# Altium PCB ESP32-with-USB_V0.1.PcbDoc (part 1 of 3)
Units mil, origin at the board's own origin, x right, y up, seen from the top; angles counter-clockwise.
Board outline 2720 x 1080 mil, 2 copper layers (TOP, BOTTOM); 64 components, 73 nets, 299 pads, 189 vias.
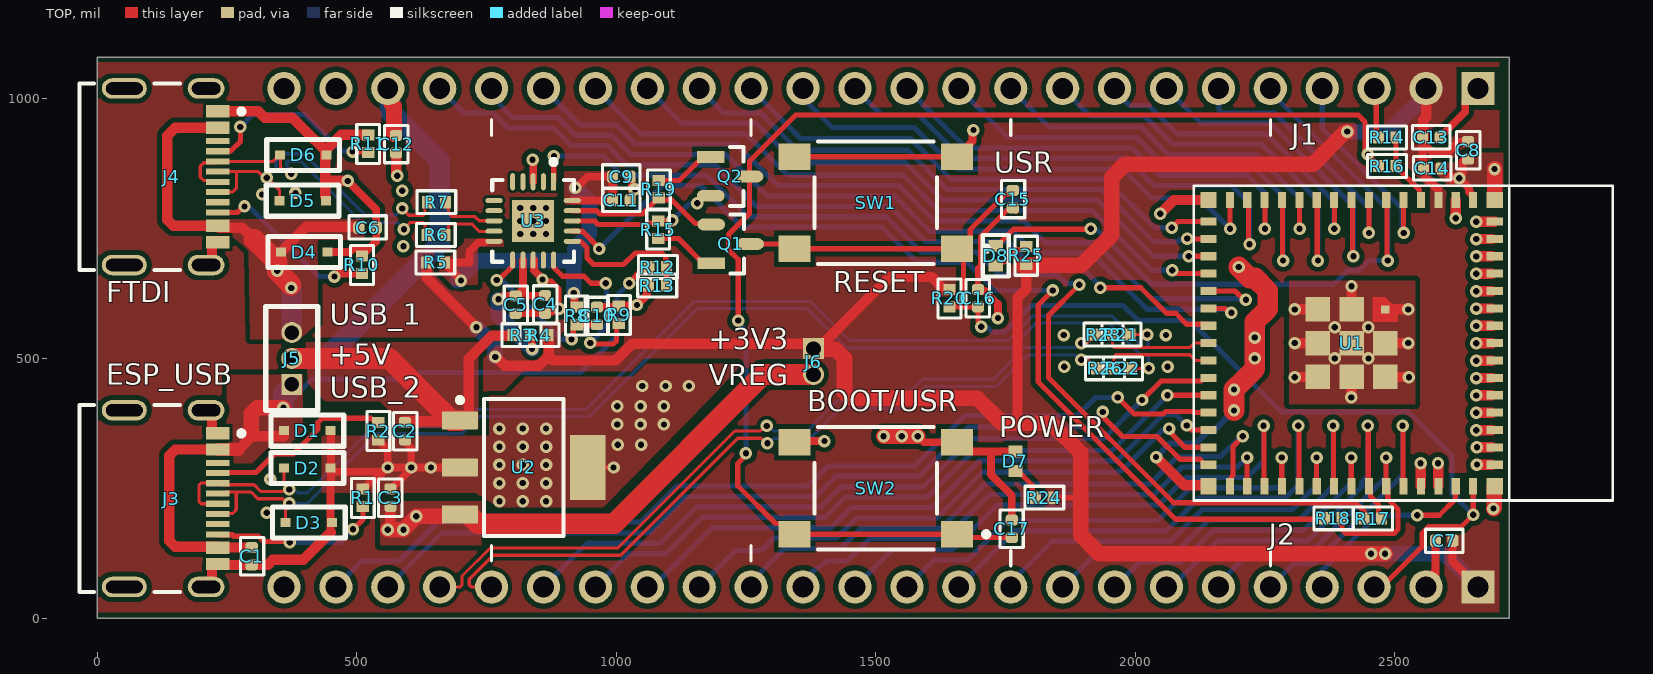
[diagram p0: TOP view]
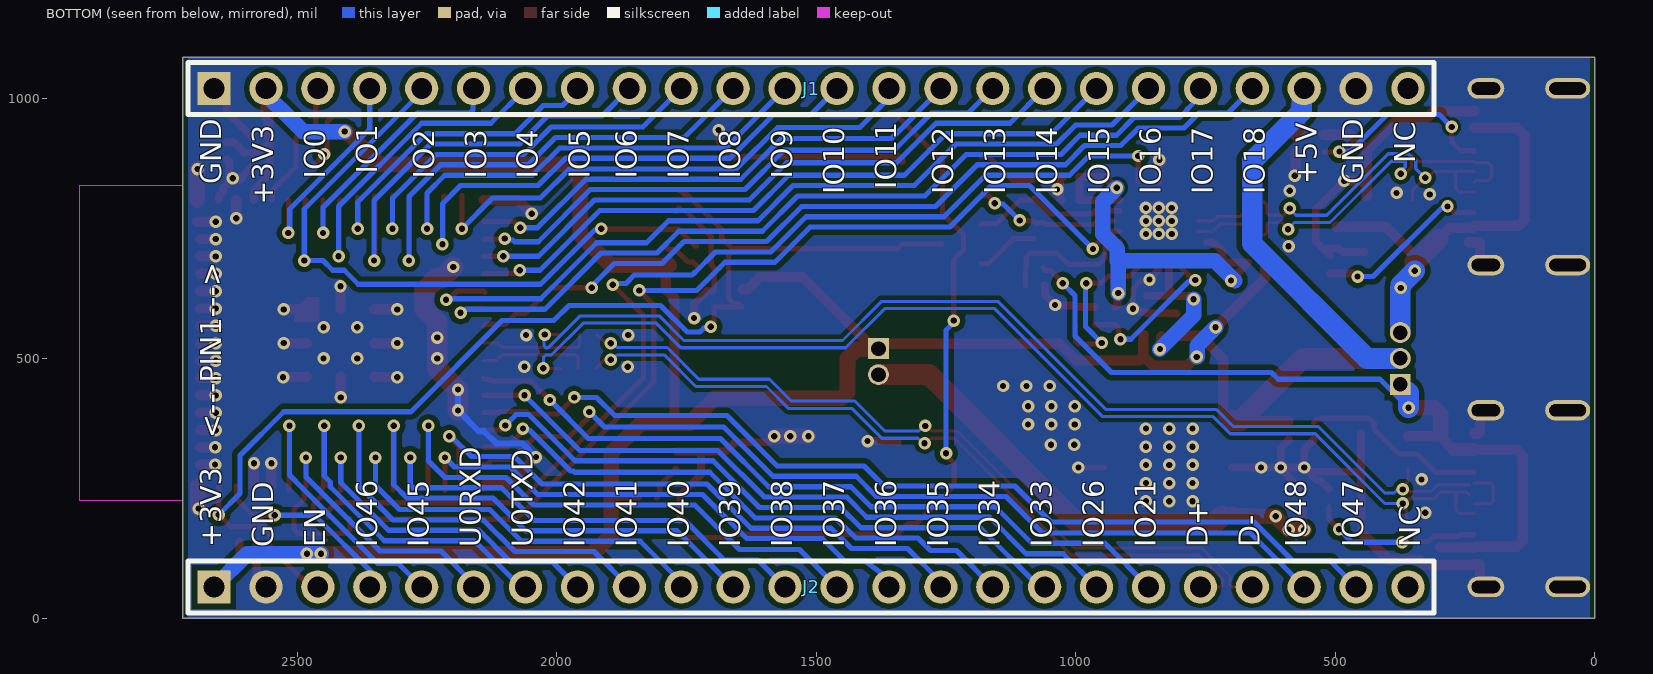
[diagram p1: BOTTOM view, seen from below]
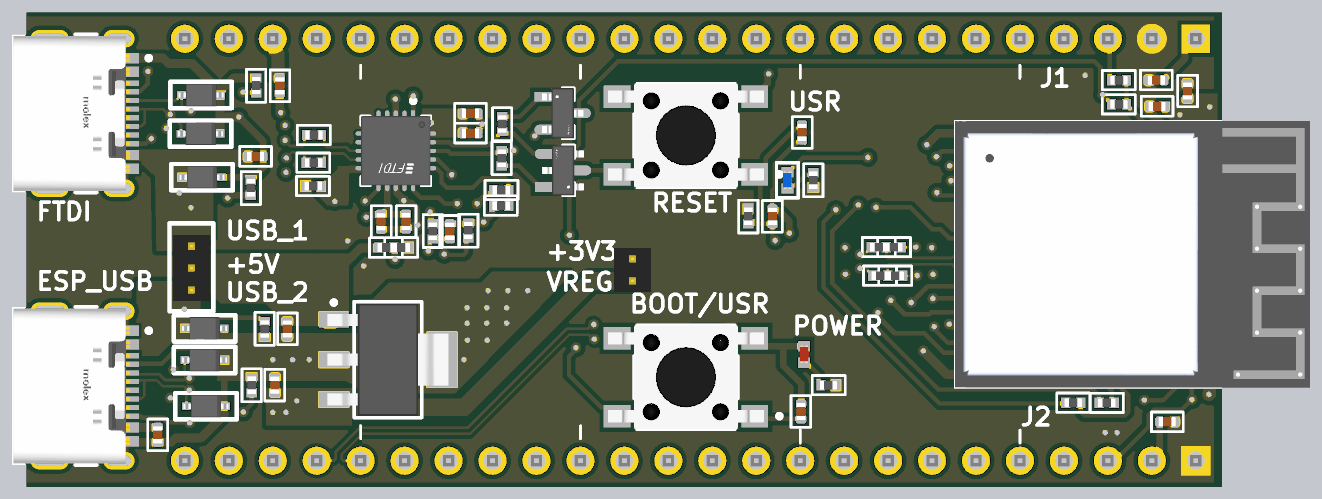
[diagram p3: 3D render of the assembled board from above, using the file's embedded part models]

## Layer stack, top to bottom
Top Solder: solder mask 0.4, Solder Resist, Dk 3.5
TOP: signal copper 1.378
Dielectric 1: dielectric 12.6, FR-4, Dk 4.8
BOTTOM: signal copper 1.378
Bottom Solder: solder mask 0.4, Solder Resist, Dk 3.5

## Board outline
0,0 2720,0 2720,1080 0,1080

## Design rules (kind name [scope] priority, off if disabled: settings)
Clearance DIFF90_Clearance [InDifferentialPairClass('DIFF90')] p1: gap=8 ignorepadtopadclearanceinfootprint=TRUE
Clearance SMALLER [WithinRoom('FTDI') or WithinRoom('USB') or WithinRoom('USB_1')] p2: gap=6 ignorepadtopadclearanceinfootprint=TRUE
Clearance [All] p3: gap=10 ignorepadtopadclearanceinfootprint=TRUE
ComponentClearance R22R26 [InComponent('R22') vs InComponent('R26')] p1: gap=0 collisioncheckmode=3 verticalgap=0 showdistances=FALSE
ComponentClearance R3R4 [InComponent('R3') vs InComponent('R4')] p2: gap=0 collisioncheckmode=3 verticalgap=0 showdistances=FALSE
ComponentClearance R21R23 [InComponent('R21') vs InComponent('R23')] p3: gap=0 collisioncheckmode=3 verticalgap=0 showdistances=FALSE
ComponentClearance [All] p4: gap=10 collisioncheckmode=3 verticalgap=10 showdistances=FALSE
DiffPairsRouting DIFF90 [InDifferentialPairClass('DIFF90')] p1: maxlimit=8.1 minlimit=8 mostfreqgap=8 toplayer_minwidth=6.03 toplayer_maxwidth=6.23 toplayer_prefwidth=6.03 bottomlayer_minwidth=6.03 bottomlayer_maxwidth=6.23 bottomlayer_prefwidth=6.03 maxuncoupledlength=500
DiffPairsRouting [All] p2: maxlimit=10 minlimit=10 mostfreqgap=10 toplayer_minwidth=15 toplayer_maxwidth=15 toplayer_prefwidth=15 bottomlayer_minwidth=15 bottomlayer_maxwidth=15 bottomlayer_prefwidth=15 maxuncoupledlength=500
NetAntennae [All] p1: netantennaetolerance=10
PlaneConnect [All] p1: pad.planeconnectstyle=Relief pad.reliefexpansion=20 pad.reliefentries=4 pad.reliefconductorwidth=20 pad.reliefairgap=10 via.planeconnectstyle=Direct via.reliefexpansion=20 via.reliefentries=4 via.reliefconductorwidth=10 via.reliefairgap=10
PolygonConnect [All] p1: connectstyle=Direct reliefconductorwidth=10 reliefentries=4 polygonreliefangle="90 Angle" airgapwidth=10
RoomDefinition USB_1 [False vs False] p1: confinementstyle=ConfineIn formatcopy=TRUE lockcomponents=FALSE outline 182.36,995.43 302.36,995.43 302.36,705.43 182.36,705.43
RoomDefinition USB [False vs False] p2: confinementstyle=ConfineIn formatcopy=TRUE lockcomponents=FALSE outline 183.74,375.13 303.74,375.13 303.74,85.13 183.74,85.13
RoomDefinition FTDI [False vs False] p3: confinementstyle=ConfineIn formatcopy=TRUE lockcomponents=FALSE outline 728,872 975,872 975,651 728,651
RoutingVias [All] p1: holewidth=12 width=24 viastyle="Through Hole" minholewidth=12 minwidth=24 maxholewidth=12 maxwidth=24
SilkToSilkClearance [All] p1: silktosilkclearance=3.94
SilkToSolderMaskClearance [IsPad] p1: minsilkscreentomaskgap=3.15 clearancetoexposedcopper=TRUE
SolderMaskExpansion [All] p1: expansion=2 istentingtop=FALSE
Width [All] p1: maxlimit=100 minlimit=10 preferedwidth=10 minimp=50.000000 maximp=50.000000 favimp=50.000000
24 further rules are at their usual default settings.

## Classes and differential pairs
differential pair class DIFF90: CON1_USB CON2_USB CON_ESP_USB ESP_USB FTDI_USB
differential pair ESP_USB: +ESP_USB_P -ESP_USB_N
differential pair FTDI_USB: +FTDI_USB_P -FTDI_USB_N
differential pair CON2_USB: +CON2_USB_P -CON2_USB_N
differential pair CON_ESP_USB: +CON_ESP_USB_P -CON_ESP_USB_N
differential pair CON1_USB: +CON1_USB_P -CON1_USB_N

## Components (designator, comment, footprint, x,y, rotation, side; value= is the part's Value field where it differs from the comment)
C1 "100nF, 50V" CAPC1005X55N 298,119 r90 top value=100nF
C2 "4.7UF, 10V" CAPC1005X55N 593,360 r90 top value=4.7uF
C3 "10uF, 6.3V" CAPC1005X55N 565,231.93 r270 top value=10uF
C4 "100nF, 50V" CAPC1005X55N 863,604 r90 top value=100nF
C5 "4.7UF, 10V" CAPC1005X55N 806.26,603.71 r90 top value=4.7uF
C6 "100nF, 50V" CAPC1005X55N 521,752 r180 top value=100nF
C7 "100nF, 50V" CAPC1005X55N 2595.07,149 r0 top value=100nF
C8 "100nF, 50V" CAPC1005X55N 2641,901 r90 top value=100nF
C9 "100nF, 50V" CAPC1005X55N 1009.92,850.14 r180 top value=100nF
C10 "100nF, 50V" CAPC1005X55N 963,582 r270 top value=100nF
C11 "100nF, 50V" CAPC1005X55N 1010,805 r180 top value=100nF
C12 "100nF, 50V" CAPC1005X55N 576,913 r90 top value=100nF
C13 "10uF, 6.3V" CAPC1005X55N 2570.22,925.75 r180 top value=10uF
C14 "100nF, 50V" CAPC1005X55N 2572,866 r180 top value=100nF
C15 "100nF, 50V" CAPC1005X55N 1764,807 r90 top value=100nF
C16 "1 µF 25V" CAPC1005X55N 1697,616 r270 top value=1uF
C17 "100nF, 50V" CAPC1005X55N 1762,172 r270 top value=100nF
D1 "AQ4021-01FTG-C" AQ4021-01FTG-C_0805 405,361 r180 top
D2 "AQ4021-01FTG-C" AQ4021-01FTG-C_0805 405,289 r180 top
D3 "AQ4021-01FTG-C" AQ4021-01FTG-C_0805 408,184 r180 top
D4 "AQ4021-01FTG-C" AQ4021-01FTG-C_0805 399,705 r180 top
D5 "AQ4021-01FTG-C" AQ4021-01FTG-C_0805 396,804 r180 top locked
D6 "AQ4021-01FTG-C" AQ4021-01FTG-C_0805 397,892 r180 top locked
D7 "RED" LED_RED_0402 1769,302 r90 top
D8 "BLUE" LED_BLUE_0402 1731.06,697.96 r90 top
J1 "C7145888" HDR_1X24_2.54MM 2660,1020 r90 bottom
J2 "C7145888" HDR_1X24_2.54MM 2660,60 r90 bottom
J3 "217179-0001" FP-2171790001-MFG 97.8,230.08 r270 top locked
J4 "217179-0001" FP-2171790001-MFG 97.8,850.08 r270 top locked
J5 "FTS-103-01-F-S" HDR_1X3_1.27MM 375,450 r180 top
J6 "FTS-102-01-F-S" HDR_1X2_1.27MM 1380,519 r0 top
Q1 "SS8050-G" FP-SS8050-G-IPC_B#1 1220.42,720.6 r0 top
Q2 "SS8050-G" FP-SS8050-G-IPC_B#2 1219.42,850.6 r0 top
R1 "5.1K, 0402" RESC1005X37N 512,232 r90 top value=5.1kR
R2 "5.1K, 0402" RESC1005X37N 541.72,359.75 r270 top value=5.1kR
R3 "0Ohm, 0402" RESC1005X37N 817.99,545 r0 top value=0R
R4 "0Ohm, 0402" RESC1005X37N 852.01,545 r180 top value=0R
R5 "0Ohm, 0402" RESC1005X37N 652,685 r0 top value=0R
R6 "27R 1%" RESC1005X37N 653,738 r0 top value=27R
R7 "27R 1%" RESC1005X37N 654,801 r0 top value=27R
R8 "0Ohm, 0402" RESC1005X37N 924,582 r270 top value=0R
R9 "10K" RESC1005X37N 1005,584 r90 top value=10kR
R10 "5.1K, 0402" RESC1005X37N 510.14,680.75 r90 top value=5.1kR
R11 "5.1K, 0402" RESC1005X37N 522.23,913.66 r90 top value=5.1kR
R12 "4.7k, 0402" RESC1005X37N 1079.99,676 r180 top value=4.7kR
R13 "10K" RESC1005X37N 1079.52,640.5 r0 top value=10kR
R14 "27R 1%" RESC1005X37N 2485.22,925.75 r0 top value=27R
R15 "10K" RESC1005X37N 1080.84,747.89 r270 top value=10kR
R16 "27R 1%" RESC1005X37N 2485.22,870.75 r0 top value=27R
R17 "0Ohm, 0402" RESC1005X37N 2457.14,191.73 r180 top value=0R
R18 "0Ohm, 0402" RESC1005X37N 2381,192 r180 top value=0R
R19 "10K" RESC1005X37N 1082,826 r90 top value=10kR
R20 "10K" RESC1005X37N 1642,616 r90 top value=10kR
R21 "0Ohm, 0402" RESC1005X37N 1973.01,546 r180 top value=0R
R22 "0Ohm, 0402" RESC1005X37N 1975.98,481 r180 top value=0R
R23 "0Ohm, 0402" RESC1005X37N 1939.01,546 r0 top value=0R
R24 "1k, 0402" RESC1005X37N 1824.19,231.77 r180 top value=1kR
R25 "1k, 0402" RESC1005X37N 1789.88,698.39 r90 top value=1kR
R26 "0Ohm, 0402" RESC1005X37N 1941.99,481 r0 top value=0R
SW1 "PTS645SM43SMTR92LFS" FP-PTS645SM43SMTR92LFS-MFG 1500,800 r180 top locked
SW2 "PTS645SM43SMTR92LFS" FP-PTS645SM43SMTR92LFS-MFG 1500,250 r180 top locked
U1 "ESP32-S3-MINI" XCVR_ESP32-S3-MINI-1-N8 2416.41,529.61 r270 top locked
U2 "TL1963A-33DCYR" DCY0004A_N 821.97,290 r0 top locked
U3 "FT231XQ-R" FP-QFN-20-IPC_B 840,765 r270 top locked

## Footprints (in the part's own frame and the unit in brackets; to place one, negate y for a bottom-side part, rotate by r counter-clockwise, add the part's x,y. Pads: shape width x height; smd on the part's side, far side on the other; paste and mask are expansions set on the pad)
AQ4021-01FTG-C_0805 [mm]
  rect 0.49x0.45 smd: 1(-1.14,0) 2(1.14,0)
  silkscreen extent -1.78,-0.76 1.78,0.76, body extent -1.3,-0.65 1.3,0.65, height 1.1
CAPC1005X55N [mm]
  rrect53% 0.54x0.6 smd: 1(-0.43,0) 2(0.43,0)
  silkscreen extent -0.91,-0.58 0.91,0.56, body extent -0.5,-0.28 0.5,0.27, height 0.5
DCY0004A_N [mm] "SOT223, 4-Leads, Body 6.7x3.7mm, Pitch 2.3mm, IPC Medium Density"
  rrect11% 1.75x0.9 smd: 1(-3.125,2.3) 2(-3.125,0) 3(-3.125,-2.3)
  rrect6% 1.75x3.2 smd: 4(3.125,0)
  silkscreen extent -3.25,-3.35 1.95,3.42, body extent -3.5,-3.25 3.5,3.25, height 1.62
FP-2171790001-MFG [mm]
  rect 0.6x1.15 smd paste+0 mask+0: A1B12(-3.2,3.425) A4B9(-2.4,3.425) B1A12(3.2,3.425) B4A9(2.4,3.425)
  rect 0.3x1.15 smd paste+0 mask+0: A5(-1.25,3.425) A6(-0.25,3.425) A7(0.25,3.425) A8(1.25,3.425) B5(1.75,3.425) B6(0.75,3.425) B7(-0.75,3.425) B8(-1.75,3.425)
  rrect100% 1x1.8 hole 1.4 slot 0.6 at 0 deg paste-2539.97 mask+0: S1(-4.32,2.85) S2(4.32,2.85)
  rrect100% 1x2.2 hole 1.8 slot 0.6 at 0 deg paste-2539.97 mask+0: S3(-4.32,-1.15) S4(4.32,-1.15)
  silkscreen extent -4.57,-3.35 4.57,4.7, body extent -4.92,-3.45 4.92,4.1, height 0.25
FP-PTS645SM43SMTR92LFS-MFG [mm]
  rect 1.55x1.3 smd paste+0 mask+0: 1(-3.975,2.25) 2(3.975,2.25) 3(-3.975,-2.25) 4(3.975,-2.25)
  silkscreen extent -5.53,-3 3,3, body extent -4.5,-3 4.5,3, height 4.3
FP-QFN-20-IPC_B [mm]
  rect 0.84x0.242 smd paste+0 mask+0: 1(-1.916,1)
  rrect100% 0.84x0.242 smd paste+0 mask+0: 2(-1.916,0.5) 3(-1.916,0) 4(-1.916,-0.5) 5(-1.916,-1) 11(1.916,-1) 12(1.916,-0.5) 13(1.916,0) 14(1.916,0.5) 15(1.916,1)
  rrect100% 0.242x0.84 smd paste+0 mask+0: 6(-1,-1.916) 7(-0.5,-1.916) 8(0,-1.916) 9(0.5,-1.916) 10(1,-1.916) 16(1,1.916) 17(0.5,1.916) 18(0,1.916) 19(-0.5,1.916) 20(-1,1.916)
  rect 2.05x2.05 smd paste-1000 mask+0: 21(0,0)
  silkscreen extent -3.01,-2 2,2, body extent -2.59,-2.59 2.59,2.59, height 0.25
FP-SS8050-G-IPC_B#1 [mm]
  rect 1.357x0.572 smd paste+0 mask+0: 1(-0.951,-0.95)
  rrect100% 1.357x0.572 smd paste+0 mask+0: 2(-0.951,0.95) 3(0.951,0)
  silkscreen extent 0,-1.45 0.65,1.45, body extent -1.21,-1.45 1.21,1.45, height 1.15
FP-SS8050-G-IPC_B#2 [mm]
  rect 1.357x0.572 smd paste+0 mask+0: 1(-0.951,0.95)
  rrect100% 1.357x0.572 smd paste+0 mask+0: 2(-0.951,-0.95) 3(0.951,0)
  silkscreen extent 0,-1.45 0.65,1.45, body extent -1.88,-1.7 1.88,1.7, height 0.25
HDR_1X2_1.27MM [mil]
  rect 40x40 hole 28: 1(0,0)
  round 40 hole 28: 2(0,-50)
  body extent -44,-75 41,25, height 154
HDR_1X3_1.27MM [mil]
  rect 40x40 hole 28: 1(0,0)
  round 40 hole 28: 2(0,-50) 3(0,-100)
  silkscreen extent -50,-150 50,50, body extent -43,-123 42,27, height 154
HDR_1X24_2.54MM [mil]
  rect 64x64 hole 40: 1(0,0)
  round 64 hole 40: 2(0,-100) 3(0,-200) 4(0,-300) 5(0,-400) 6(0,-500) 7(0,-600) 8(0,-700) 9(0,-800) 10(0,-900) 11(0,-1000) 12(0,-1100) 13(0,-1200) 14(0,-1300) 15(0,-1400) 16(0,-1500) 17(0,-1600) 18(0,-1700) 19(0,-1800) 20(0,-1900) 21(0,-2000) 22(0,-2100) 23(0,-2200) 24(0,-2300)
  silkscreen extent -50,-2350 50,50, body extent -49,-2350 49,50, height 378
LED_BLUE_0402 [mm]
  rect 0.6x0.7 smd: A+(-0.475,0) K-(0.475,0)
  silkscreen extent -1.02,-0.64 1.02,0.64, body extent -0.51,-0.25 0.51,0.25, height 0.45
LED_RED_0402 [mm]
  rect 0.6x0.7 smd: A+(-0.475,0) K-(0.475,0)
  body extent -0.51,-0.25 0.51,0.25, height 0.45
RESC1005X37N [mm]
  rect 0.54x0.6 smd: 1(-0.432,0) 2(0.432,0)
  silkscreen extent -0.97,-0.56 0.94,0.56, body extent -0.5,-0.25 0.5,0.25, height 0.37
XCVR_ESP32-S3-MINI-1-N8 [mm]
  rect 0.8x0.4 smd: 1(-7,5.95) 2(-7,5.1) 3(-7,4.25) 4(-7,3.4) 5(-7,2.55) 6(-7,1.7) 7(-7,0.85) 8(-7,0) 9(-7,-0.85) 10(-7,-1.7) 11(-7,-2.55) 12(-7,-3.4) 13(-7,-4.25) 14(-7,-5.1) 15(-7,-5.95) 31(7,-5.95) 32(7,-5.1) 33(7,-4.25) 34(7,-3.4) 35(7,-2.55) 36(7,-1.7) 37(7,-0.85) 38(7,0) 39(7,0.85) 40(7,1.7) 41(7,2.55) 42(7,3.4) 43(7,4.25) 44(7,5.1) 45(7,5.95)
  rect 0.4x0.8 smd: 16(-5.95,-7) 17(-5.1,-7) 18(-4.25,-7) 19(-3.4,-7) 20(-2.55,-7) 21(-1.7,-7) 22(-0.85,-7) 23(0,-7) 24(0.85,-7) 25(1.7,-7) 26(2.55,-7) 27(3.4,-7) 28(4.25,-7) 29(5.1,-7) 30(5.95,-7) 46(5.95,7) 47(5.1,7) 48(4.25,7) 49(3.4,7) 50(2.55,7) 51(1.7,7) 52(0.85,7) 53(0,7) 54(-0.85,7) 55(-1.7,7) 56(-2.55,7) 57(-3.4,7) 58(-4.25,7) 59(-5.1,7) 60(-5.95,7)
  rect 0.8x0.8 smd: 61(-7,7) 62(-7,-7) 63(7,-7) 64(7,7)
  rect 0.4x0.4 smd paste-1 mask+0: 65(-1.65,1.65)
  rect 1.2x1.2 smd: 66(0,1.65) 67(1.65,1.65) 68(-1.65,0) 69(0,0) 70(1.65,0) 71(-1.65,-1.65) 72(0,-1.65) 73(1.65,-1.65)
  TOP region: -1.05,1.05 -2.25,1.05 -2.25,1.65 -1.65,2.25 -1.05,2.25
  Keep-Out Layer region: 7.7,7.725 -7.7,7.725 -7.7,12.775 7.7,12.775
  Keep-Out Layer region: 7.7,7.725 -7.7,7.725 -7.7,12.775 7.7,12.775
  silkscreen extent -7.7,-7.73 7.7,12.78, body extent -7.7,-7.73 7.7,12.78, height 2.55

## Part data
C1 C4 C6 C7 C8 C9 C10 C11 C12 C14 C15 C17: library part CL05B104KB54PNC, "0.1 µF ±10% 50V Ceramic Capacitor X7R 0402 (1005 Metric)", Case/Package=343Case, LCSC Part Number=C307331, Manufacturer=Samsung, Max Operating Temperature=125°C, Min Operating Temperature=-55°C, Tolerance=10%, Voltage Rating=50V, Category="Ceramic Capacitors", ComponentLink1Description=https://datasheet.octopart.com/CL05B104KB54PNC-Samsung-datasheet-8326407.pdf?src-supplier=TME, ComponentLink1URL=https://datasheet.octopart.com/CL05B104KB54PNC-Samsung-datasheet-8326407.pdf?src-supplier=TME, Height=550um, Manufacturer Part Number=CL05B104KB54PNC, Material=4241ConductorMaterial, Pricing="10000=0.0057 (USD)", RoHS=Yes, RoHS Compliant=Yes, Stock=2120000, Supplier="Arrow Electronics", Supplier Part Number=CL05B104KB54PNC
C2 C5: library part CL05A475MP5NRNC, "CAP CER 4.7UF 10V X5R 0402", Capacitor Type=Ceramic, Case/Package=0402, LCSC Part Number=C23733, Manufacturer=Samsung, Max Operating Temperature=85°C, Min Operating Temperature=-55°C, Package Shape=Rectangular, Package Style=SMTMeter, Rated DC Voltage (URdc)=10V, Supplier Part Number=1276-1482-1-ND, Temperature Characteristics Code=X5R, Tolerance  (fill in as +-)=20%, Category="Ceramic Capacitors", ComponentLink1Description=https://datasheet.ciiva.com:443/pdfs/VipMasterIC/IC/SEMS/SEMS-S-A0009022611/SEMS-S-A0009022611-1.pdf?src-supplier=IHS+Markit, ComponentLink1URL=https://datasheet.ciiva.com:443/pdfs/VipMasterIC/IC/SEMS/SEMS-S-A0009022611/SEMS-S-A0009022611-1.pdf?src-supplier=IHS+Markit, ComponentLink2Description=https://datasheet.ciiva.com/25786/cl05a475mp5nrnc-25786963.pdf?src-supplier=Digikey, ComponentLink2URL=https://datasheet.ciiva.com/25786/cl05a475mp5nrnc-25786963.pdf?src-supplier=Digikey, ComponentLink3Description=https://datasheet.ciiva.com/16437/cl05b104kq5nnnc-16437353.pdf?src-supplier=Future+Electronics, ComponentLink3URL=https://datasheet.ciiva.com/16437/cl05b104kq5nnnc-16437353.pdf?src-supplier=Future+Electronics, Dielectric Material=Ceramic, Height=0.65mm, JESD-609 Code=e3, Length=1mm, Manufacturer Part Number=CL05A475MP5NRNC, Mounting Technology="Surface Mount", Multilayer=Yes, Packaging="Tape and Reel", Pins=2, Pricing="1=0.1, 10=0.064, 50=0.0368, 100=0.0286, 500=0.0215, 1000=0.01689, 2500=0.01535, 5000=0.01412 (USD)", Reach SVHC Compliant=Yes, RoHS=Yes, RoHS Compliant=Yes, Stock=2427092, Supplier=Digikey, Terminal Finish=Nickel, Termination=Wraparound, Tolerance (fill in as +-)=20%, Width=0.5mm
C3 C13: library part GRM155R60J106ME05D, "10 µF ±20% 6.3V Ceramic Capacitor X5R 0402 (1005 Metric)", Case/Package=343Case, Dielectric=1537DielectricType, LCSC Part Number=C723895, Manufacturer=Murata, Max Operating Temperature=85°C, Min Operating Temperature=-55°C, Supplier Part Number=5135029, Tolerance=20%, Voltage Rating=6.3V, Category="Ceramic Capacitors", ComponentLink1Description=https://datasheet.octopart.com/GRM155R60J106ME05D-Murata-datasheet-155239051.pdf?src-supplier=Element14, ComponentLink1URL=https://datasheet.octopart.com/GRM155R60J106ME05D-Murata-datasheet-155239051.pdf?src-supplier=Element14, ComponentLink2Description=https://datasheet.octopart.com/GRM155R60J106ME05D-Murata-datasheet-165579666.pdf?src-supplier=TME, ComponentLink2URL=https://datasheet.octopart.com/GRM155R60J106ME05D-Murata-datasheet-165579666.pdf?src-supplier=TME, Height=700um, Length=1mm, Manufacturer Part Number=GRM155R60J106ME05D, Material=4241ConductorMaterial, Pricing="10000=0.0104, 30000=0.0099, 50000=0.0097, 100000=0.0095, 200000=0.0091 (USD)", RoHS=Yes, Stock=20000, Supplier="Future Electronics", Thickness=500um, Voltage Rating (DC)=6.3V, Width=500um
C16: library part CL05A105KA5NQNC, "1 µF ±10% 25V Ceramic Capacitor X5R 0402 (1005 Metric)", Capacitor Type=Ceramic, Case/Package=0402, LCSC Part Number=C52923, Manufacturer=Samsung, Max Operating Temperature=85°C, Min Operating Temperature=-55°C, Package Shape=Rectangular, Package Style=SMTMeter, Rated DC Voltage (URdc)=25V, Supplier Part Number=1276-1445-1-ND, Temperature Characteristics Code=X5R, Tolerance  (fill in as +-)=10%, Category="Ceramic Capacitors", ComponentLink1Description=https://datasheet.ciiva.com:443/pdfs/VipMasterIC/IC/SEMS/SEMS-S-A0008384515/SEMS-S-A0008872946-1.pdf?src-supplier=IHS+Markit, ComponentLink1URL=https://datasheet.ciiva.com:443/pdfs/VipMasterIC/IC/SEMS/SEMS-S-A0008384515/SEMS-S-A0008872946-1.pdf?src-supplier=IHS+Markit, ComponentLink2Description=https://datasheet.ciiva.com/25720/cl05a105ka5nqnc-25720771.pdf?src-supplier=Digikey, ComponentLink2URL=https://datasheet.ciiva.com/25720/cl05a105ka5nqnc-25720771.pdf?src-supplier=Digikey, ComponentLink3Description=https://datasheet.ciiva.com/3777/cl05a105ka5nqnc-3777709.pdf?src-supplier=Arrow+Electronics, ComponentLink3URL=https://datasheet.ciiva.com/3777/cl05a105ka5nqnc-3777709.pdf?src-supplier=Arrow+Electronics, ComponentLink4Description=https://datasheet.ciiva.com/29198/459147-da-01-en-vs-kondensator-0402-29198339.pdf?src-supplier=Conrad, ComponentLink4URL=https://datasheet.ciiva.com/29198/459147-da-01-en-vs-kondensator-0402-29198339.pdf?src-supplier=Conrad, Dielectric Material=Ceramic, Height=0.6mm, JESD-609 Code=e3, Length=1mm, Manufacturer Part Number=CL05A105KA5NQNC, Mounting Technology="Surface Mount", Multilayer=Yes, Packaging="Tape and Reel", Pins=2, Pricing="1=0.18, 10=0.124, 50=0.0742, 100=0.0584, 500=0.04312, 1000=0.0357, 2500=0.03323, 5000=0.0304 (USD)", Reach SVHC Compliant=Yes, RoHS=Yes, RoHS Compliant=Yes, Stock=1937229, Supplier=Digikey, Terminal Finish=Nickel, Termination=Wraparound, Tolerance (fill in as +-)=10%, Width=0.5mm
D1 D2 D3 D4 D5 D6: "Trans Voltage Suppressor Diode", LCSC Part Number=C708873, Manufacturer=Littelfuse, Peak Reflow Temperature (Cel)=260°C, Supplier Part Number=F10397CT-ND, Time @ Peak Reflow Temperature-Max (s)=40s, Category="TVS Diodes", ComponentLink1Description=https://datasheet.ciiva.com:443/pdfs/VipMasterIC/IC/LFSI/LFSI-S-A0009000937/LFSI-S-A0009000937-1.pdf?src-supplier=IHS+Markit, ComponentLink1URL=https://datasheet.ciiva.com:443/pdfs/VipMasterIC/IC/LFSI/LFSI-S-A0009000937/LFSI-S-A0009000937-1.pdf?src-supplier=IHS+Markit, ComponentLink2Description=http://www.farnell.com/datasheets/2571805.pdf?src-supplier=Farnell, ComponentLink2URL=http://www.farnell.com/datasheets/2571805.pdf?src-supplier=Farnell, ComponentLink3Description=http://www.farnell.com/datasheets/2571805.pdf?src-supplier=Newark, ComponentLink3URL=http://www.farnell.com/datasheets/2571805.pdf?src-supplier=Newark, ComponentLink4Description=http://www.littelfuse.com/~/media/electronics/datasheets/tvs_diode_arrays/littelfuse_tvs_diode_array_aq4021_datasheet.pdf.pdf?src-supplier=Digikey, ComponentLink4URL=http://www.littelfuse.com/~/media/electronics/datasheets/tvs_diode_arrays/littelfuse_tvs_diode_array_aq4021_datasheet.pdf.pdf?src-supplier=Digikey, ComponentLink5Description=https://www.littelfuse.com/~/media/electronics/datasheets/tvs_diode_arrays/littelfuse_tvs_diode_array_aq4021_datasheet.pdf.pdf?src-supplier=Digikey, ComponentLink5URL=https://www.littelfuse.com/~/media/electronics/datasheets/tvs_diode_arrays/littelfuse_tvs_diode_array_aq4021_datasheet.pdf.pdf?src-supplier=Digikey, Diode Type="TRANS VOLTAGE SUPPRESSOR", JESD-609 Code=e3, Manufacturer Part Number=AQ4021-01FTG-C, Moisture Sensitivity Level=1, Pricing="1=0.57, 10=0.498, 100=0.3447, 500=0.28802, 1000=0.24513 (USD)", Reach SVHC Compliant=Yes, RoHS=Yes, RoHS Compliant=Yes, Stock=6289, Supplier=Digikey, Terminal Finish=Tin
D7: library part VLMS1500-GS08, "LED RED 0402 SMD", Case Code (Imperial)=0402, Case Code (Metric)=1005, Color=Red, Forward Current=30mA, Forward Voltage=2V, LCSC Part Number=C511370, Manufacturer=Vishay, Max Operating Temperature=85°C, Min Operating Temperature=-30°C, Package Quantity=9000, Power Rating=75mW, Supplier Part Number=VLMS1500-GS08CT-ND, Test Current=20mA, Case/Package=0402, Category=LEDs, ComponentLink1Description=http://components.arrow.com/part/dataview/56357384S461524N5680?src-supplier=Arrow+Electronics, ComponentLink1URL=http://components.arrow.com/part/dataview/56357384S461524N5680?src-supplier=Arrow+Electronics, ComponentLink2Description=http://www.mouser.com/ds/2/427/vlmo1500-244705.pdf?src-supplier=Mouser, ComponentLink2URL=http://www.mouser.com/ds/2/427/vlmo1500-244705.pdf?src-supplier=Mouser, ComponentLink3Description=http://www.farnell.com/datasheets/1809983.pdf?src-supplier=Farnell, ComponentLink3URL=http://www.farnell.com/datasheets/1809983.pdf?src-supplier=Farnell, ComponentLink4Description=http://www.alliedelec.com/m/d/cfc385e1097fc985ee9a50a3551ac188.pdf?src-supplier=Allied+Electronics, ComponentLink4URL=http://www.alliedelec.com/m/d/cfc385e1097fc985ee9a50a3551ac188.pdf?src-supplier=Allied+Electronics, ComponentLink5Description=https://datasheet.octopart.com/VLMS1500-GS08-Vishay-datasheet-62332426.pdf?src-supplier=Newark, ComponentLink5URL=https://datasheet.octopart.com/VLMS1500-GS08-Vishay-datasheet-62332426.pdf?src-supplier=Newark, ComponentLink6Description=http://www.vishay.com/docs/82554/vlmo1500.pdf?src-supplier=Avnet, ComponentLink6URL=http://www.vishay.com/docs/82554/vlmo1500.pdf?src-supplier=Avnet, ComponentLink7Description=https://datasheet.octopart.com/VLMS1500-GS08-Vishay-datasheet-21227148.pdf?src-supplier=Future+Electronics, ComponentLink7URL=https://datasheet.octopart.com/VLMS1500-GS08-Vishay-datasheet-21227148.pdf?src-supplier=Future+Electronics, ComponentLink8Description=http://www.farnell.com/datasheets/2050839.pdf?src-supplier=Newark, ComponentLink8URL=http://www.farnell.com/datasheets/2050839.pdf?src-supplier=Newark, ComponentLink9Description=http://www.farnell.com/datasheets/1809983.pdf?src-supplier=Element14, ComponentLink9URL=http://www.farnell.com/datasheets/1809983.pdf?src-supplier=Element14, ComponentLink10Description=https://datasheet.octopart.com/VLMS1500-GS08-Vishay-datasheet-33014519.pdf?src-supplier=Element14, ComponentLink10URL=https://datasheet.octopart.com/VLMS1500-GS08-Vishay-datasheet-33014519.pdf?src-supplier=Element14, ComponentLink11Description=http://www.farnell.com/datasheets/1809983.pdf?src-supplier=Newark, ComponentLink11URL=http://www.farnell.com/datasheets/1809983.pdf?src-supplier=Newark, ComponentLink12Description=http://datasheet.octopart.com/VLMS1500-GS08-Vishay-datasheet-21227148.pdf?src-supplier=Avnet, ComponentLink12URL=http://datasheet.octopart.com/VLMS1500-GS08-Vishay-datasheet-21227148.pdf?src-supplier=Avnet, ComponentLink13Description=http://datasheet.octopart.com/VLMS1500-GS08-Vishay-datasheet-21227148.pdf?src-supplier=LCSC, ComponentLink13URL=http://datasheet.octopart.com/VLMS1500-GS08-Vishay-datasheet-21227148.pdf?src-supplier=LCSC, ComponentLink14Description=http://datasheet.octopart.com/VLMS1500-GS08-Vishay-datasheet-21227148.pdf?src-supplier=Quest, ComponentLink14URL=http://datasheet.octopart.com/VLMS1500-GS08-Vishay-datasheet-21227148.pdf?src-supplier=Quest, ComponentLink15Description=http://datasheet.octopart.com/VLMS1500-GS08-Vishay-datasheet-21227148.pdf?src-supplier=NAC+Semi, ComponentLink15URL=http://datasheet.octopart.com/VLMS1500-GS08-Vishay-datasheet-21227148.pdf?src-supplier=NAC+Semi, Dominant Wavelength=631nm, Height=0.55mm, Illumination Color=Red, Lead Free="Lead Free", Length=1mm, Lens Size=0.5mm, Lens Style=Flat,Rectangular,Square, Luminous Intensity=54mcd, Manufacturer Part Number=VLMS1500-GS08, Mounting Technology="Surface Mount", Number of LEDs=1, Packaging="Tape and Reel", Pins=2, Pricing="1=0.34, 10=0.265, 100=0.119, 500=0.10746, 1000=0.08827 (USD)", Radiation Hardening=No, Reach SVHC Compliant=Unknown, RoHS=Yes, RoHS Compliant=Yes, Series=CHipLED, Stock=52203, Supplier=Digikey, Viewing Angle=130°, Wavelength=631nm, Width=0.5mm
D8: library part VLMB1500-GS08, "LED BLUE 0402 SMD 468nm", LCSC Part Number=C511042, Manufacturer=Vishay, Supplier Part Number=VLMB1500-GS08CT-ND, Category=LEDs, ComponentLink1Description=https://datasheet.ciiva.com/30005/vlmo1500-30005132.pdf?src-supplier=Avnet, ComponentLink1URL=https://datasheet.ciiva.com/30005/vlmo1500-30005132.pdf?src-supplier=Avnet, Manufacturer Part Number=VLMB1500-GS08, Pricing="1=0.39, 10=0.307, 100=0.1378, 500=0.12444, 1000=0.10221 (USD)", RoHS=Yes, Stock=74699, Supplier=Digikey
J1 J2: library part 0022284245, "CONN HEADER VERT 24POS 2.54MM", Flammability Rating="UL94 V-0", Manufacturer=Molex, Supplier Part Number=900-0022284245-ND, Category=Uncategorized, ComponentLink1Description=https://datasheet.ciiva.com:443/pdfs/VipMasterIC/IC/MOLE/MOLE-S-A0006764423/MOLE-S-A0006877704-1.pdf?src-supplier=IHS+Markit, ComponentLink1URL=https://datasheet.ciiva.com:443/pdfs/VipMasterIC/IC/MOLE/MOLE-S-A0006764423/MOLE-S-A0006877704-1.pdf?src-supplier=IHS+Markit, ComponentLink2Description=https://datasheet.ciiva.com/6814/022284363-sd-6814049.pdf?src-supplier=Digikey, ComponentLink2URL=https://datasheet.ciiva.com/6814/022284363-sd-6814049.pdf?src-supplier=Digikey, ComponentLink3Description=https://datasheet.ciiva.com/10075/0022284245-pcb-headers-10075617.pdf?src-supplier=Avnet, ComponentLink3URL=https://datasheet.ciiva.com/10075/0022284245-pcb-headers-10075617.pdf?src-supplier=Avnet, ComponentLink4Description=https://datasheet.ciiva.com/5153/0022284245-pcb-headers-228340-5153875.pdf?src-supplier=Mouser, ComponentLink4URL=https://datasheet.ciiva.com/5153/0022284245-pcb-headers-228340-5153875.pdf?src-supplier=Mouser, ComponentLink5Description=https://datasheet.ciiva.com/1433/1597854-1433759.pdf?src-supplier=Element14, ComponentLink5URL=https://datasheet.ciiva.com/1433/1597854-1433759.pdf?src-supplier=Element14, Connector Type="BOARD CONNECTOR", Contact Finish - Mating=GOLD, Contact Finish - Termination="Tin (Sn)", Contact Gender=Male, Contact Material=Brass, DIN Conformance=No, Filter Feature=No, IEC Conformance=No, JESD-609 Code=e3, LCSC Part Number=C7145888, Manufacturer Part Number=0022284245, Mating Information="MULTIPLE MATING PARTS AVAILABLE", MIL Conformance=No, Mixed Contacts=No, Mounting Style=STRAIGHT, Mounting Technology=Board, Number of Contacts=24, Number of Rows Loaded=1, Option="General Purpose", Pricing="1=0.95, 10=0.789, 100=0.6579, 1000=0.57911 (USD)", Reach SVHC Compliant=Yes, RoHS=Yes, RoHS Compliant=Yes, Stock=2996, Supplier=Digikey, Terminal Pitch=2.54mm, Termination=Solder
J3 J4: "USB Type C - Connector, Top-mount SMT, 16pos", LCSC Part Number=C3197684, Manufacturer=Molex, Supplier Part Number=900-2171790001CT-ND, Category=Connectors, Manufacturer Part Number=217179-0001, Pricing="1=0.9, 10=0.745, 100=0.6212 (USD)", RoHS=No, Supplier=Digikey
J5: "CONN HEADER VERT 3POS 1.27MM", Flammability Rating="UL94 V-0", LCSC Part Number=C3333578, Manufacturer=Samtec, Manufacturer Series=FTS, Supplier Part Number=612-FTS-103-01-F-S-ND, Additional Feature="Low Profile", Category=Connectors, ComponentLink1Description=https://datasheet.ciiva.com:443/pdfs/VipMasterIC/IC/SAMI/SAMI-S-A0001504673/SAMI-S-A0001504673-1.pdf?src-supplier=IHS+Markit, ComponentLink1URL=https://datasheet.ciiva.com:443/pdfs/VipMasterIC/IC/SAMI/SAMI-S-A0001504673/SAMI-S-A0001504673-1.pdf?src-supplier=IHS+Markit, ComponentLink2Description=http://suddendocs.samtec.com/prints/fts-1xx-xx-xx-xx-xx-mkt.pdf?src-supplier=Digikey, ComponentLink2URL=http://suddendocs.samtec.com/prints/fts-1xx-xx-xx-xx-xx-mkt.pdf?src-supplier=Digikey, ComponentLink3Description=http://www.samtec.com/documents/webfiles/pdf/FTS.pdf?src-supplier=Avnet, ComponentLink3URL=http://www.samtec.com/documents/webfiles/pdf/FTS.pdf?src-supplier=Avnet, ComponentLink4Description=https://datasheet.octopart.com/FTS-103-01-F-S-Samtec-datasheet-116535195.pdf?src-supplier=Toby+Electronics, ComponentLink4URL=https://datasheet.octopart.com/FTS-103-01-F-S-Samtec-datasheet-116535195.pdf?src-supplier=Toby+Electronics, ComponentLink5Description=https://datasheet.octopart.com/FTS-103-01-F-S-Samtec-datasheet-151470456.pdf?src-supplier=Sager+Electronics, ComponentLink5URL=https://datasheet.octopart.com/FTS-103-01-F-S-Samtec-datasheet-151470456.pdf?src-supplier=Sager+Electronics, Connector Type="BOARD CONNECTOR", Contact Finish - Mating="GOLD (3) OVER NICKEL (50)", Contact Finish - Termination="Matte Tin (Sn) - with Nickel (Ni) barrier", Contact Gender=Male, Contact Material=Bronze, DIN Conformance=No, Filter Feature=No, IEC Conformance=No, JESD-609 Code=e3, Manufacturer Part Number=FTS-103-01-F-S, MIL Conformance=No, Mixed Contacts=No, Mounting Style=STRAIGHT, Mounting Technology=Board, Number of Contacts=3, Number of Rows Loaded=1, Option="General Purpose", Pricing="1=0.73, 50=0.6378, 100=0.5407, 500=0.4491, 1000=0.4 (USD)", Reach SVHC Compliant=Yes, RoHS=Yes, RoHS Compliant=Yes, Stock=3030, Supplier=Digikey, Terminal Pitch=1.27mm, Termination=Solder
J6: "CONN HEADER VERT 2POS 1.27MM", Flammability Rating="UL94 V-0", Insulation Color=Black, LCSC Part Number=C6045317, Manufacturer=Samtec, Max Operating Temperature=125°C, Min Operating Temperature=-55°C, Supplier Part Number=SAM15176-ND, Category=Connectors, ComponentLink1Description=http://www.samtec.com/documents/webfiles/pdf/FTS.pdf?src-supplier=Avnet, ComponentLink1URL=http://www.samtec.com/documents/webfiles/pdf/FTS.pdf?src-supplier=Avnet, Contact Finish - Mating=GOLD, Contact Material=Bronze, Contact Plating=Gold, Contact Shape=Square, Contact Type="Male Pin", Fastening Type=Pull, Gender=Male, Insulation Material=Polymer, Manufacturer Part Number=FTS-102-01-F-S, Mounting Technology="Through Hole", Number of Contacts=2, Number of Positions=2, Number of Rows=1, Packaging=Bulk, Pitch=1.27mm, Pricing="1=0.49, 50=0.4252, 100=0.3608, 500=0.2994, 1000=0.2625 (USD)", Radiation Hardening=No, RoHS=Yes, RoHS Compliant=Yes, Series=FTS, Stock=848, Supplier=Digikey, Termination=Solder
Q1 Q2: "TRANS NPN 25V 1.5A SOT23-3", LCSC Part Number=C164886, Manufacturer=Comchip, Supplier Part Number=641-1790-1-ND, Category=Transistors, ComponentLink1Description=https://datasheet.ciiva.com:443/pdfs/VipMasterIC/IC/COMC/COMC-S-A0004994192/COMC-S-A0004994192-1.pdf?src-supplier=IHS+Markit, ComponentLink1URL=https://datasheet.ciiva.com:443/pdfs/VipMasterIC/IC/COMC/COMC-S-A0004994192/COMC-S-A0004994192-1.pdf?src-supplier=IHS+Markit, ComponentLink2Description="http://www.comchiptech.com/admin/files/product/SS8050-G RevA181526.pdf?src-supplier=Digikey", ComponentLink2URL="http://www.comchiptech.com/admin/files/product/SS8050-G RevA181526.pdf?src-supplier=Digikey", Manufacturer Part Number=SS8050-G, Pricing="1=0.29, 10=0.2, 100=0.0978, 500=0.08154, 1000=0.05666 (USD)", Reach SVHC Compliant=Yes, RoHS=Yes, RoHS Compliant=Yes, Stock=90458, Supplier=Digikey
R1 R2 R10 R11: library part RC0402FR-075K1L, "5.1kOhm 1% 1/16W 0402", Case/Package=0402, LCSC Part Number=C105872, Manufacturer=Yageo, Max Operating Temperature=155°C, Min Operating Temperature=-55°C, Package Height=0.35mm, Package Length=1mm, Package Shape=Rectangular, Package Style=SMTMeter, Package Width=0.5mm, Power=62.5mW, Rated Temperature=70°C, Resistor Type="FIXED RESISTOR", Supplier Part Number=311-5.10KLRCT-ND, Temperature Coefficient=100ppm/°C, Tolerance=1%, Working Voltage=50V, Additional Feature="LASER TRIMMABLE", Category="Chip SMD Resistors", ComponentLink1Description=https://datasheet.ciiva.com:443/pdfs/VipMasterIC/IC/YAGO/YAGO-S-A0008145938/YAGO-S-A0008145938-1.pdf?src-supplier=IHS+Markit, ComponentLink1URL=https://datasheet.ciiva.com:443/pdfs/VipMasterIC/IC/YAGO/YAGO-S-A0008145938/YAGO-S-A0008145938-1.pdf?src-supplier=IHS+Markit, Construction=Chip, JESD-609 Code=e3, Manufacturer Part Number=RC0402FR-075K1L, Mounting Technology="Surface Mount", Packaging="Tape and Reel", Pins=2, Pricing="1=0.1, 10=0.015, 50=0.0088, 100=0.0073, 500=0.00488, 1000=0.00417, 5000=0.00297 (USD)", Reach SVHC Compliant=Yes, RoHS=Yes, RoHS Compliant=Yes, Stock=360279, Supplier=Digikey, Technology="METAL GLAZE/THICK FILM", Terminal Finish=Nickel, Termination=Wraparound
R3 R4 R5 R8 R17 R18 R21 R22 R23 R26: library part RC0402JR-070RL, "RES 0 OHM JUMPER 1/16W 0402", Case/Package=0402, LCSC Part Number=C60485, Manufacturer=Yageo, Max Operating Temperature=155°C, Min Operating Temperature=-55°C, Package Height=0.35mm, Package Length=1mm, Package Shape=Rectangular, Package Style=SMTMeter, Package Width=0.5mm, Power=62.5mW, Rated Temperature=70°C, Resistor Type="FIXED RESISTOR", Supplier Part Number=311-0.0JRCT-ND, Category="Chip SMD Resistors", ComponentLink1Description=https://datasheet.ciiva.com:443/pdfs/VipMasterIC/IC/YAGO/YAGO-S-A0008145938/YAGO-S-A0008145938-1.pdf?src-supplier=IHS+Markit, ComponentLink1URL=https://datasheet.ciiva.com:443/pdfs/VipMasterIC/IC/YAGO/YAGO-S-A0008145938/YAGO-S-A0008145938-1.pdf?src-supplier=IHS+Markit, Construction=Chip, JESD-609 Code=e3, Manufacturer Part Number=RC0402JR-070RL, Mounting Technology="Surface Mount", Packaging="Tape and Reel", Pins=2, Pricing="1=0.1, 10=0.011, 25=0.0084, 50=0.0064, 100=0.0045, 250=0.00364, 500=0.0029, 1000=0.00214, 5000=0.00154 (USD)", Reach SVHC Compliant=Yes, RoHS=Yes, RoHS Compliant=Yes, Stock=5084390, Supplier=Digikey, Technology="METAL GLAZE/THICK FILM", Terminal Finish=Nickel, Termination=Wraparound
R6 R7 R14 R16: library part RC0402FR-0727RL, "27 OHM 1% 1/16W 0402", Case Code (Imperial)=0402, Case Code (Metric)=1005, LCSC Part Number=C138021, Manufacturer=Yageo, Max Operating Temperature=155°C, Max Power Dissipation=63mW, Min Operating Temperature=-55°C, Power Rating=62.5mW, Resistance Tolerance=1%, Resistor Type="Thick Film", Supplier Part Number=YAG3086CT-ND, Temperature Coefficient=100ppm/°C, Voltage Rating=50V, Case/Package=0402, Category="Chip SMD Resistors", ComponentLink1Description=https://datasheet.ciiva.com/11808/0900766b80c66297-11808450.pdf?src-supplier=Rs, ComponentLink1URL=https://datasheet.ciiva.com/11808/0900766b80c66297-11808450.pdf?src-supplier=Rs, ComponentLink2Description=https://datasheet.ciiva.com/17044/pyu-rc0402-51-rohs-l-6-17044345.pdf?src-supplier=Future+Electronics, ComponentLink2URL=https://datasheet.ciiva.com/17044/pyu-rc0402-51-rohs-l-6-17044345.pdf?src-supplier=Future+Electronics, ComponentLink3Description=https://datasheet.ciiva.com/7849/1018594-7849927.pdf?src-supplier=Element14, ComponentLink3URL=https://datasheet.ciiva.com/7849/1018594-7849927.pdf?src-supplier=Element14, ComponentLink4Description=https://datasheet.ciiva.com/7849/1018594-7849926.pdf?src-supplier=Element14, ComponentLink4URL=https://datasheet.ciiva.com/7849/1018594-7849926.pdf?src-supplier=Element14, Construction=Rectangular, Depth=0.5mm, Features="Moisture Resistant", Height=0.016inch, Lead Free="Lead Free", Length=1mm, Manufacturer Part Number=RC0402FR-0727RL, Military Standard=Not, Number of Terminations=2, Packaging="Tape and Reel", Pricing="1=0.1, 10=0.015, 50=0.0088, 100=0.0073, 500=0.00488, 1000=0.00417, 5000=0.00297 (USD)", Reach SVHC Compliant=Unknown, RoHS=Yes, RoHS Compliant=Yes, Series=RC, Stock=268173, Supplier=Digikey, Technology="THICK FILM", Termination=SMD/SMT, Tolerance=1%, Voltage Rating (AC)=50V, Weight=2.3E-05oz, Width=0.5mm
R9 R13 R15 R19 R20: library part AC0402FR-0710KL, "10 kOhm, ± 1%, 62.5 mW, 0402 [1005 Metric], SMD Chip Resistor, Thick Film, General Purpose", Case Code (Imperial)=0402, Case Code (Metric)=1005, LCSC Part Number=C144807, Manufacturer=Yageo, Max Operating Temperature=155°C, Max Power Dissipation=63mW, Min Operating Temperature=-55°C, Power Rating=62.5mW, Supplier Part Number=YAG3436CT-ND, Temperature Coefficient=100ppm/°C, Tolerance=1%, Voltage Rating=50V, Case/Package=0402, Category="Chip SMD Resistors", ComponentLink1Description=https://datasheet.ciiva.com/12656/pyu-ac-51-rohs-l-2-12656634.pdf?src-supplier=Mouser, ComponentLink1URL=https://datasheet.ciiva.com/12656/pyu-ac-51-rohs-l-2-12656634.pdf?src-supplier=Mouser, Features="Moisture Resistant,Automotive AEC-Q200", Height=0.015inch, Lead Free="Lead Free", Length=0.039inch, Manufacturer Part Number=AC0402FR-0710KL, Number of Terminations=2, Packaging="Tape and Reel", Pricing="1=0.1, 10=0.019, 50=0.0116, 100=0.0095, 500=0.00638, 1000=0.00544, 5000=0.00391 (USD)", RoHS=Yes, RoHS Compliant=Yes, Series=AC, Stock=2394753, Supplier=Digikey, Termination=SMD/SMT, Width=0.02inch
R12: library part RC0402FR-074K7L, "RES 4.7K OHM 1% 1/16W 0402", Case/Package=0402, LCSC Part Number=C105871, Manufacturer=Yageo, Max Operating Temperature=155°C, Min Operating Temperature=-55°C, Package Height=0.35mm, Package Length=1mm, Package Shape=Rectangular, Package Style=SMTMeter, Package Width=0.5mm, Power=62.5mW, Rated Temperature=70°C, Resistor Type="FIXED RESISTOR", Supplier Part Number=603-RC0402FR-074K7L, Temperature Coefficient=100ppm/°C, Tolerance=1%, Working Voltage=50V, Additional Feature="LASER TRIMMABLE", Category="Chip SMD Resistors", ComponentLink1Description=https://datasheet.ciiva.com:443/pdfs/VipMasterIC/IC/YAGO/YAGO-S-A0008145938/YAGO-S-A0008145938-1.pdf?src-supplier=IHS+Markit, ComponentLink1URL=https://datasheet.ciiva.com:443/pdfs/VipMasterIC/IC/YAGO/YAGO-S-A0008145938/YAGO-S-A0008145938-1.pdf?src-supplier=IHS+Markit, ComponentLink2Description=https://datasheet.ciiva.com/22661/1686128-22661342.pdf?src-supplier=Element14, ComponentLink2URL=https://datasheet.ciiva.com/22661/1686128-22661342.pdf?src-supplier=Element14, ComponentLink3Description=https://datasheet.ciiva.com/7850/1018594-7850022.pdf?src-supplier=Element14, ComponentLink3URL=https://datasheet.ciiva.com/7850/1018594-7850022.pdf?src-supplier=Element14, ComponentLink4Description=https://datasheet.ciiva.com/7850/1018594-7850023.pdf?src-supplier=Element14, ComponentLink4URL=https://datasheet.ciiva.com/7850/1018594-7850023.pdf?src-supplier=Element14, ComponentLink5Description=https://datasheet.ciiva.com/15215/getdatasheetpartid-328119-15215035.pdf?src-supplier=Verical, ComponentLink5URL=https://datasheet.ciiva.com/15215/getdatasheetpartid-328119-15215035.pdf?src-supplier=Verical, Construction=Chip, JESD-609 Code=e3, Manufacturer Part Number=RC0402FR-074K7L, Mounting Technology="Surface Mount", Packaging="Tape and Reel", Pins=2, Pricing="1=0.1, 10=0.009, 50=0.009, 100=0.005, 1000=0.005, 10000=0.002 (USD)", Reach SVHC Compliant=Yes, RoHS=Yes, RoHS Compliant=Yes, Stock=1678412, Supplier=Mouser, Technology="METAL GLAZE/THICK FILM", Terminal Finish=Nickel, Termination=Wraparound
R24 R25: library part RC0402FR-071KL, "RES 1K OHM 1% 1/16W 0402", Case Code (Imperial)=0402, Case Code (Metric)=1005, LCSC Part Number=C106235, Manufacturer=Yageo, Max Operating Temperature=155°C, Max Power Dissipation=63mW, Min Operating Temperature=-55°C, Power Rating=62.5mW, Resistance Tolerance=1%, Resistor Type="Thick Film", Supplier Part Number=311-1.00KLRCT-ND, Temperature Coefficient=100ppm/°C, Voltage Rating=50V, Case/Package=0402, Category="Chip SMD Resistors", ComponentLink1Description=https://datasheet.ciiva.com/11819/0900766b80c66297-11819477.pdf?src-supplier=Rs, ComponentLink1URL=https://datasheet.ciiva.com/11819/0900766b80c66297-11819477.pdf?src-supplier=Rs, ComponentLink2Description=https://datasheet.ciiva.com/7983/1018594-7983502.pdf?src-supplier=Element14, ComponentLink2URL=https://datasheet.ciiva.com/7983/1018594-7983502.pdf?src-supplier=Element14, ComponentLink3Description=https://datasheet.ciiva.com/22747/1018594-22747513.pdf?src-supplier=Element14, ComponentLink3URL=https://datasheet.ciiva.com/22747/1018594-22747513.pdf?src-supplier=Element14, ComponentLink4Description=https://datasheet.ciiva.com/12666/pyu-rc0402-51-rohs-l-6-r-12666741.pdf?src-supplier=Mouser, ComponentLink4URL=https://datasheet.ciiva.com/12666/pyu-rc0402-51-rohs-l-6-r-12666741.pdf?src-supplier=Mouser, ComponentLink5Description=https://datasheet.ciiva.com/7849/1018594-7849869.pdf?src-supplier=Element14, ComponentLink5URL=https://datasheet.ciiva.com/7849/1018594-7849869.pdf?src-supplier=Element14, ComponentLink6Description=https://datasheet.ciiva.com/7849/1018594-7849871.pdf?src-supplier=Element14, ComponentLink6URL=https://datasheet.ciiva.com/7849/1018594-7849871.pdf?src-supplier=Element14, ComponentLink7Description=https://datasheet.ciiva.com/17063/pyu-rc0402-51-rohs-l-6-r-17063193.pdf?src-supplier=Future+Electronics, ComponentLink7URL=https://datasheet.ciiva.com/17063/pyu-rc0402-51-rohs-l-6-r-17063193.pdf?src-supplier=Future+Electronics, Construction=Rectangular, Depth=0.5mm, Features="Moisture Resistant", Height=0.32mm, Lead Free=5697LeadFree, Length=1mm, Manufacturer Part Number=RC0402FR-071KL, Military Standard=Not, Number of Terminations=2, Packaging="Tape and Reel", Pins=2, Pricing="1=0.1, 10=0.015, 50=0.0088, 100=0.0073, 500=0.00488, 1000=0.00417, 5000=0.00297 (USD)", Reach SVHC Compliant=No, RoHS=Yes, RoHS Compliant=Yes, Series=RC, Stock=8231639, Supplier=Digikey, Technology="THICK FILM", Termination=SMD/SMT, Tolerance=1%, Voltage Rating (AC)=50V, Voltage Rating (DC)=50V, Width=0.5mm
SW1 SW2: "SWITCH TACTILE SPST-NO 0.05A 12V", Contact Current(DC)-Max=50mA, Contact DC Max Rating R Load=0.05A@12VDC, Contact Resistance=0.1mR, Contact Voltage(DC)-Max=12V, Dielectric Withstand Volts=250VACV, Insulation Resistance=100GR, LCSC Part Number=C221880, Manufacturer="ITT C&K", Max Operating Temperature=60°C, Min Operating Temperature=-20°C, Supplier Part Number=CKN9112CT-ND, Actuator Type=Pushbutton, Body Breadth=5.9944inch, Body Height=3.4544mm, Body Length or Diameter=5.9944mm, Category="Tactile Switches", ComponentLink1Description=https://datasheet.ciiva.com:443/pdfs/VipMasterIC/IC/CKCI/CKCI-S-A0001796527/CKCI-S-A0001796842-1.pdf?src-supplier=IHS+Markit, ComponentLink1URL=https://datasheet.ciiva.com:443/pdfs/VipMasterIC/IC/CKCI/CKCI-S-A0001796527/CKCI-S-A0001796842-1.pdf?src-supplier=IHS+Markit, ComponentLink2Description=https://datasheet.ciiva.com/29903/getdatasheetpartid-786341-29903846.pdf?src-supplier=Verical, ComponentLink2URL=https://datasheet.ciiva.com/29903/getdatasheetpartid-786341-29903846.pdf?src-supplier=Verical, ComponentLink3Description=https://datasheet.ciiva.com/14920/pts645-14920735.pdf?src-supplier=Digikey, ComponentLink3URL=https://datasheet.ciiva.com/14920/pts645-14920735.pdf?src-supplier=Digikey, ComponentLink4Description=https://datasheet.ciiva.com/14920/pts645-14920734.pdf?src-supplier=Digikey, ComponentLink4URL=https://datasheet.ciiva.com/14920/pts645-14920734.pdf?src-supplier=Digikey, Electrical Life=100000Cycles, JESD-609 Code=e4, Manufacturer Part Number=PTS645SM43SMTR92LFS, Mounting Technology="Surface Mount", PCB Hole Count=4, Pricing="1=0.32, 10=0.308, 25=0.2916, 100=0.2641, 250=0.24072, 500=0.22376 (USD)", Reach SVHC Compliant=Yes, RoHS=Yes, RoHS Compliant=Yes, Stock=311585, Supplier=Digikey, Switch Action=MOMENTARY, Switch Function=SPST, Switch Type=Keypad, Terminal Finish=Silver, Terminal Length=0.138inch, Termination=Solder
U1: library part ESP32-S3-MINI-1-N8, "ESP32-S3FN8, 8 MB SPI flash, PCB antenna", LCSC Part Number=C2913206, Manufacturer="Espressif Systems", Supplier Part Number=1965-ESP32-S3-MINI-1-N8CT-ND, Category=LDO, ComponentLink1Description=https://datasheet.octopart.com/ESP32-S3-MINI-1-N8-Espressif-Systems-datasheet-165560562.pdf?src-supplier=TME, ComponentLink1URL=https://datasheet.octopart.com/ESP32-S3-MINI-1-N8-Espressif-Systems-datasheet-165560562.pdf?src-supplier=TME, Manufacturer Part Number=ESP32-S3-MINI-1-N8, Pricing="1=3.1 (USD)", RoHS=No, Stock=19254, Supplier=Digikey
U2: "IC REG LINEAR 3.3V 1.5A SOT223-4", Case/Package=SOP, Dropout Voltage1-Max=550mV, Dropout Voltage1-Nom=340mV, Input Voltage Absolute-Max=20V, LCSC Part Number=C181262, Manufacturer="Texas Instruments", Min Input Voltage=3.8V, Operating Temperature, TJ-Max=125°C, Operating Temperature, TJ-Min=-40°C, Output Current1-Max=1.5A, Output Voltage1-Max=3.4V, Output Voltage1-Min=3.2V, Output Voltage1-Nom=3.3V, Package Body Material=Plastic, Package Shape=Rectangular, Package Style="SMALL OUTLINEMeter", Peak Reflow Temperature (Cel)=260°C, Supplier Part Number=296-24897-1-ND, Voltage Tolerance-Max=3%, Adjustability=FIXED, Category="Voltage Regulators - Linear", Channels=1, ComponentLink1Description=https://www.ti.com:443/lit/ds/symlink/tl1963a.pdf?src-supplier=IHS+Markit, ComponentLink1URL=https://www.ti.com:443/lit/ds/symlink/tl1963a.pdf?src-supplier=IHS+Markit, ComponentLink2Description=https://datasheet.ciiva.com/2046/-2046068.pdf?src-supplier=Digikey, ComponentLink2URL=https://datasheet.ciiva.com/2046/-2046068.pdf?src-supplier=Digikey, Height - Seated (Max)=1.8mm, JESD-30 Code=R-PDSO-G4, JESD-609 Code=e3, Length=6.5mm, Line Regulation-Max=0.01%, Load Regulation-Max=0.07%, Manufacturer Part Number=TL1963A-33DCYR, Max Supply Voltage=20V, Moisture Sensitivity Level=2, Number of Outputs=1, Packaging="Tape and Reel", Pins=4, Pricing="1=2.87, 10=2.578, 25=2.4368, 100=2.112, 250=2.00368, 500=1.79788, 1000=1.51629 (USD)", Qualification Status="Not Qualified", Reach SVHC Compliant=Yes, Regulator Type="FIXED POSITIVE SINGLE OUTPUT LDO REGULATOR", RoHS=Yes, RoHS Compliant=Yes, Stock=2958, Supplier=Digikey, Surface Mount=Yes, Technology=BIPOLAR, Terminal Finish=Tin, Terminal Form="Gull Wing", Terminal Pitch=2.3mm, Terminal Position=DUAL, Width=3.5mm
U3: "IC USB SERIAL FULL UART 20QFN", Case/Package=HVQCCN, LCSC Part Number=C132159, Manufacturer=FTDI, Max Operating Temperature=85°C, Max Supply Current=8.4mA, Max Supply Voltage=5.5V, Min Operating Temperature=-40°C, Min Supply Voltage=2.97V, Nominal Supply Voltage=5V, Package Shape=Square, Package Style="CHIP CARRIER, HEAT SINK/SLUG, VERY THIN PROFILEMeter", Power Supplies=3.3/5V, Supplier Part Number=768-1128-1-ND, Temperature Grade=INDUSTRIAL, Category="Interface ICs", ComponentLink1Description=https://datasheet.ciiva.com:443/pdfs/VipMasterIC/IC/FTDI/FTDIS00099/FTDIS00099-1.pdf?src-supplier=IHS+Markit, ComponentLink1URL=https://datasheet.ciiva.com:443/pdfs/VipMasterIC/IC/FTDI/FTDIS00099/FTDIS00099-1.pdf?src-supplier=IHS+Markit, ComponentLink2Description=https://datasheet.ciiva.com/1787/ds-ft231x-1787312.pdf?src-supplier=Digikey, ComponentLink2URL=https://datasheet.ciiva.com/1787/ds-ft231x-1787312.pdf?src-supplier=Digikey, ComponentLink3Description=https://datasheet.ciiva.com/4787/ds-ft231x-13571-4787570.pdf?src-supplier=Mouser, ComponentLink3URL=https://datasheet.ciiva.com/4787/ds-ft231x-13571-4787570.pdf?src-supplier=Mouser, ComponentLink4Description=https://datasheet.ciiva.com/30475/0900766b811020d3-30475405.pdf?src-supplier=Rs, ComponentLink4URL=https://datasheet.ciiva.com/30475/0900766b811020d3-30475405.pdf?src-supplier=Rs, ComponentLink5Description=https://datasheet.ciiva.com/1787/ft-x-series-1787313.pdf?src-supplier=Digikey, ComponentLink5URL=https://datasheet.ciiva.com/1787/ft-x-series-1787313.pdf?src-supplier=Digikey, ComponentLink6Description=https://datasheet.ciiva.com/1787/ft-x-series-1787314.pdf?src-supplier=Digikey, ComponentLink6URL=https://datasheet.ciiva.com/1787/ft-x-series-1787314.pdf?src-supplier=Digikey, Height - Seated (Max)=0.8mm, JESD-30 Code=S-XQCC-N20, Length=4mm, Manufacturer Part Number=FT231XQ-R, Pins=20, Pricing="1=2.34, 25=2.27, 100=2.2, 250=2, 500=1.82002, 1000=1.7625 (USD)", Qualification Status="Not Qualified", Reach SVHC Compliant=Yes, RoHS=Yes, RoHS Compliant=Yes, Stock=67762, Supplier=Digikey, Surface Mount=Yes, Technology=CMOS, Terminal Form="No Lead", Terminal Pitch=0.5mm, Terminal Position=QUAD, Width=4mm

## Via types
v1: diameter 24, hole 12, TOP to BOTTOM, tented both sides, 189 vias

## Nets (pads, with @x,y where several pads share a name; then routed paths per layer and width w, separated by ;. In a path a pad name is that pad's centre, name@x,y a point inside that pad or via, vN(x,y) a via of type N, cw(c..) or ccw(c..) an arc to the next point about the centre after c; other vN are vias at no path point)
+3V3: C7.2 C8.2 C13.2 C14.2 J1.2 J2.1 J6.1 R4.1 R5.1 R20.2 R24.1 R25.1 U1.3 | length 4621.4
  TOP w10: R24.1@1841.2,231.77 1891.23,231.77 1895,228
  TOP w15: C14.2@2553.29,870.75 C13.2@2553.29,925.75 C13.2@2554.56,927.01 ; C14.2@2555.07,866 2558.2,862.87 2558.2,849.69 2583.36,824.53 2583.36,805.57 U1.3@2583.73,805.2 ; 2556.42,912.59 2572.57,896.44 2601.73,896.44 2622.22,916.93 C8.2@2635,916.93 ; C7.2@2611.07,148.07 2611.07,108.93 J2.1@2660,60
  TOP w20: R5.1@634.99,685 634.99,655.81 v1(730.77,560.03) ; v1(767,503) 768.08,503 785.08,486 851.25,486 870,504.75 ; R4.1@869.02,545 869.65,544.37 869.65,531.61 870,531.25 870,504.75 ; J6.1@1380,519 1370.28,528.72 1030.5,528.72 997.78,496 878.74,496 870,504.75 ; J6.1@1399,529 1527,657 1608,657 1631.36,633.64 1641.37,633.64 R20.2@1642,633.01 ; 1770.95,375.28 1773,377.33 1773,616.88 1789.88,633.76 R25.1@1789.88,679.77 ; C13.2@2554.56,927.01 2554.56,960.06 2560,965.5 J1.2@2560,1011.44
  TOP w30: J6.1@1381.5,517.5 1422.14,517.5 1439.72,499.93 1439.72,434.72 1451.43,423 1696,423 1743.72,375.28 1770.95,375.28 1837.72,375.28 1895,318 1895,228 1895,159.57 1930.57,124 v1(2454,124) v1(2481,124) ; R25.1@1783.4,679.77 1789.88,679.77 1896.1,679.77 1954.45,738.12 1954.45,848.88 1979.57,874 2342,874 2405,937 v1(2408,937)
  BOTTOM w30: v1(730.77,560.03) 766.23,524.57 766.23,503.77 v1(767,503) ; v1(2408,937) 2488,937 2531,980 ; v1(2454,124) v1(2481,124) 2596,124 J2.1@2660,60 ; 2531.45,979.55 J1.2@2560,1008.09